# Altium PCB waku-ctl.PcbDoc (part 3 of 5)
Units mil, origin at the board's own origin, x right, y up, seen from the top; angles counter-clockwise.
Board outline 3530 x 2610 mil, 2 copper layers (Top Layer, Bottom Layer); 84 components, 84 nets, 358 pads, 106 vias.
Unrouted connection lines stored in the file: 42.
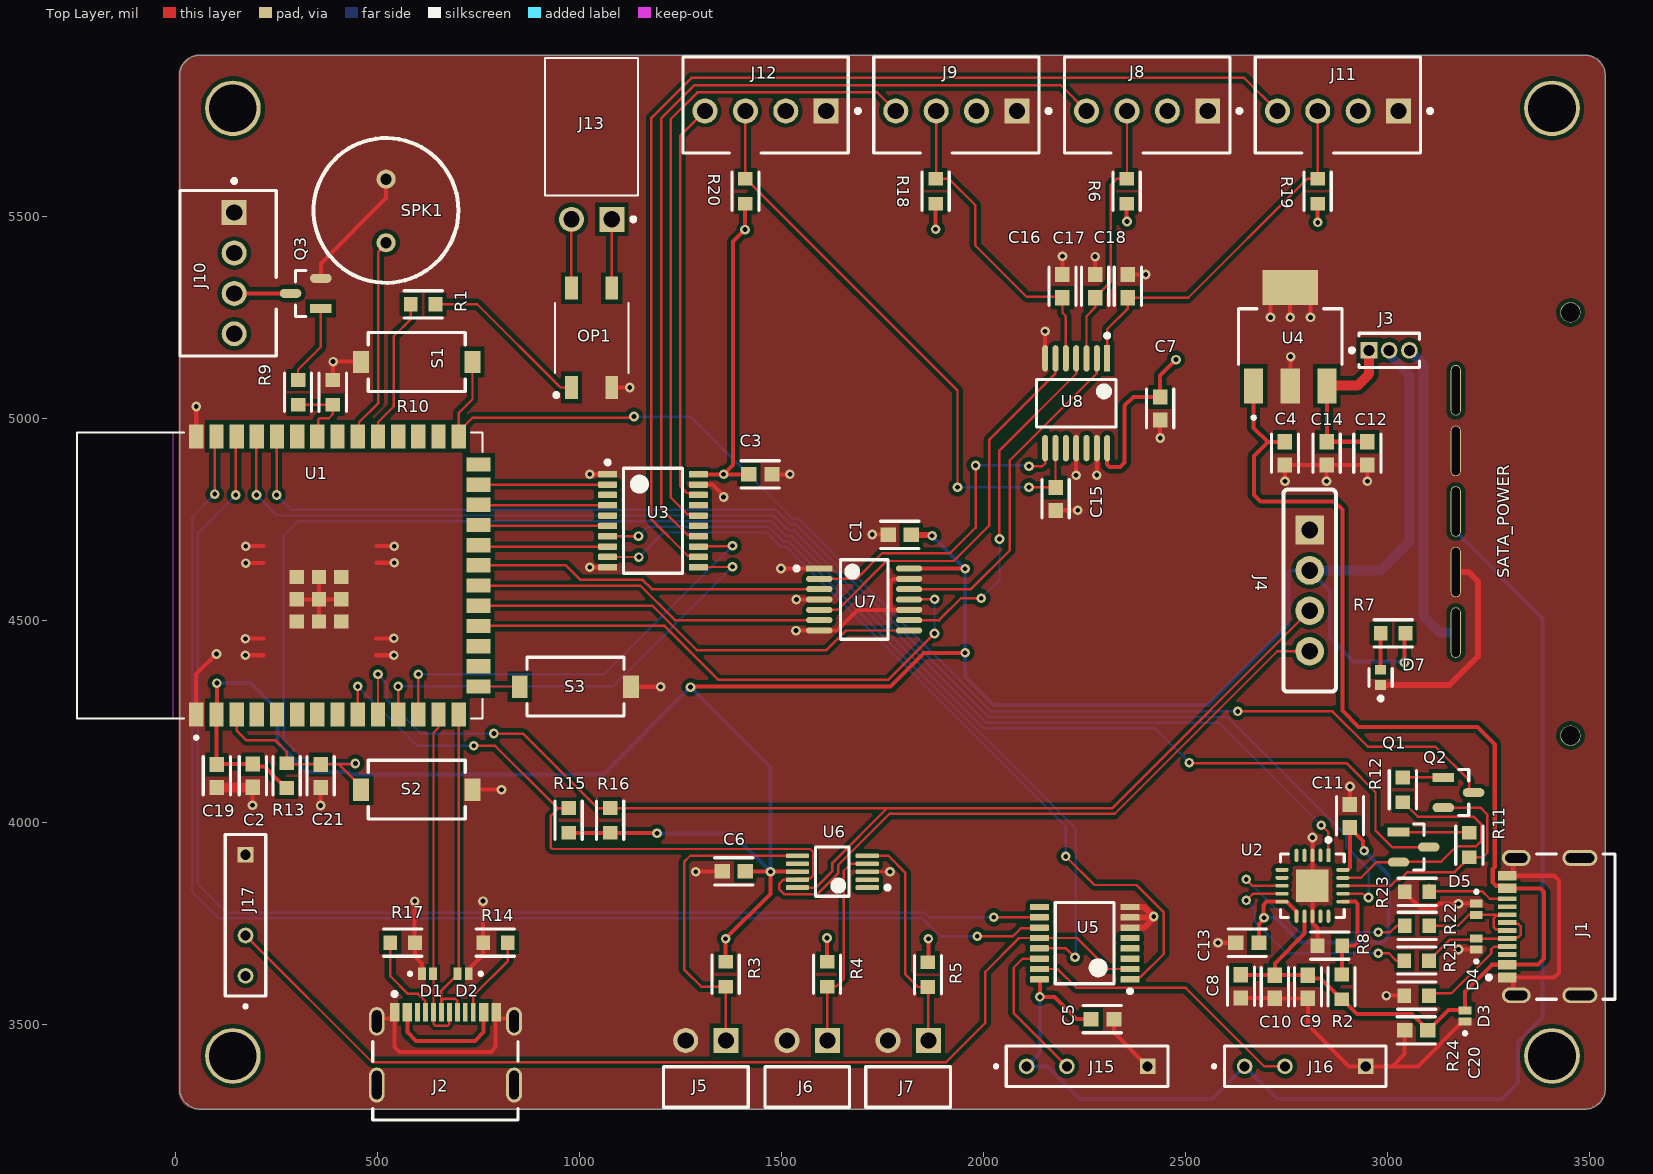
[diagram p0: Top Layer view]

## Part data (continued)
R7 R9: library part RC0603FR-101KL, "RES 1K OHM 1% 1/10W 0603", Case Code (Imperial)=0603, Case Code (Metric)=1608, LCSC Part Number=C1512170, Manufacturer="Yageo Group", Max Operating Temperature=155°C, Min Operating Temperature=-55°C, Power Dissipation=100mW, Supplier Part Number=13-RC0603FR-101KLCT-ND, Temperature Coefficient=100ppm/°C, Tolerance=1%, Voltage Rating=50V, Working Voltage=75V, Case/Package=0603, Category="Chip SMD Resistors", China RoHS=Non-Compliant, ComponentLink1Description=https://datasheet.octopart.com:443/RC0603FR-101KL-Yageo-datasheet-175887523.pdf?src-supplier=IHS, ComponentLink1URL=https://datasheet.octopart.com:443/RC0603FR-101KL-Yageo-datasheet-175887523.pdf?src-supplier=IHS, ComponentLink2Description=https://datasheet.octopart.com:443/RC0603FR-101KL-Yageo-Group-datasheet-190051977.pdf?src-supplier=Newark, ComponentLink2URL=https://datasheet.octopart.com:443/RC0603FR-101KL-Yageo-Group-datasheet-190051977.pdf?src-supplier=Newark, ComponentLink3Description=https://datasheet.octopart.com:443/RC0603FR-101KL-Yageo-Group-datasheet-189192902.pdf?src-supplier=TME, ComponentLink3URL=https://datasheet.octopart.com:443/RC0603FR-101KL-Yageo-Group-datasheet-189192902.pdf?src-supplier=TME, ComponentLink4Description=https://datasheet.octopart.com:443/RC0603FR-101KL-Yageo-Group-datasheet-176638170.pdf?src-supplier=TME, ComponentLink4URL=https://datasheet.octopart.com:443/RC0603FR-101KL-Yageo-Group-datasheet-176638170.pdf?src-supplier=TME, ComponentLink5Description=https://datasheet.octopart.com:443/RC0603FR-101KL-Yageo-datasheet-8328172.pdf?src-supplier=element14+APAC, ComponentLink5URL=https://datasheet.octopart.com:443/RC0603FR-101KL-Yageo-datasheet-8328172.pdf?src-supplier=element14+APAC, ComponentLink6Description=https://datasheet.octopart.com:443/RC0603FR-101KL-Yageo-datasheet-34211833.pdf?src-supplier=element14+APAC, ComponentLink6URL=https://datasheet.octopart.com:443/RC0603FR-101KL-Yageo-datasheet-34211833.pdf?src-supplier=element14+APAC, ComponentLink7Description=https://datasheet.octopart.com:443/RC0603FR-101KL-Yageo-datasheet-164759695.pdf?src-supplier=Future+Electronics, ComponentLink7URL=https://datasheet.octopart.com:443/RC0603FR-101KL-Yageo-datasheet-164759695.pdf?src-supplier=Future+Electronics, ComponentLink8Description=https://datasheet.octopart.com:443/RC0603FR-101KL-Yageo-datasheet-137700087.pdf?src-supplier=Future+Electronics, ComponentLink8URL=https://datasheet.octopart.com:443/RC0603FR-101KL-Yageo-datasheet-137700087.pdf?src-supplier=Future+Electronics, ComponentLink9Description=https://datasheet.octopart.com:443/RC0603FR-101KL-Yageo-datasheet-134544186.pdf?src-supplier=Future+Electronics, ComponentLink9URL=https://datasheet.octopart.com:443/RC0603FR-101KL-Yageo-datasheet-134544186.pdf?src-supplier=Future+Electronics, ComponentLink10Description=https://datasheet.octopart.com/RC0603FR-101KL-Yageo-datasheet-73766026.pdf, ComponentLink10URL=https://datasheet.octopart.com/RC0603FR-101KL-Yageo-datasheet-73766026.pdf, ComponentLink11Description=http://sigma.octopart.com:80/rohs_statement/Yageo-company-2.pdf?src-supplier=Compliance+Statements, ComponentLink11URL=http://sigma.octopart.com:80/rohs_statement/Yageo-company-2.pdf?src-supplier=Compliance+Statements, ComponentLink12Description=http://sigma.octopart.com:80/conflict_mineral_statement/Yageo-company-3.pdf?src-supplier=Compliance+Statements, ComponentLink12URL=http://sigma.octopart.com:80/conflict_mineral_statement/Yageo-company-3.pdf?src-supplier=Compliance+Statements, Composition="Thick Film", Contact Plating="Lead, Tin", Depth=800µm, Height=450µm, Length=1.6mm, Lifecycle Status=Production, Manufacturer Part Number=RC0603FR-101KL, Military Standard=Not, Mounting Technology="Surface Mount", Number of Terminals=2, Pins=2, Power Rating=100mW, Pricing="1=0.1, 10=0.008, 25=0.006, 50=0.004, 100=0.004 (USD)", Radiation Hardening=No, REACH SVHC=Yes, RoHS=Compliant, Schedule B="8533210045, 8533210045|8533210045|8533210045|8533210045|8533210045", Stock=83193, Supplier=DigiKey, Termination=SMD/SMT, Voltage Rating (DC)=50V, Width=800µm
R14 R17 R23 R24: library part RC0603FR-075K1L, "RES 5.1K OHM 1% 1/10W 0603", Case Code (Imperial)=0603, LCSC Part Number=C105580, Manufacturer="Yageo Group", Max Operating Temperature=155°C, Max Power Dissipation=100mW, Min Operating Temperature=-55°C, Supplier Part Number=311-5.10KHRCT-ND, Temperature Coefficient=100ppm/°C, Tolerance=1%, Voltage Rating=75V, Voltage Rating (DC)=50V, Case/Package=0603, Category="Chip SMD Resistors", China RoHS=Non-Compliant, ComponentLink1Description=https://datasheet.octopart.com:443/RC0603FR-075K1L-Yageo-datasheet-175887523.pdf?src-supplier=IHS, ComponentLink1URL=https://datasheet.octopart.com:443/RC0603FR-075K1L-Yageo-datasheet-175887523.pdf?src-supplier=IHS, ComponentLink2Description=https://datasheet.octopart.com:443/RC0603FR-075K1L-Yageo-datasheet-103092701.pdf?src-supplier=Upverter, ComponentLink2URL=https://datasheet.octopart.com:443/RC0603FR-075K1L-Yageo-datasheet-103092701.pdf?src-supplier=Upverter, ComponentLink3Description=https://datasheet.octopart.com:443/RC0603FR-075K1L-Yageo-datasheet-8328172.pdf?src-supplier=Farnell, ComponentLink3URL=https://datasheet.octopart.com:443/RC0603FR-075K1L-Yageo-datasheet-8328172.pdf?src-supplier=Farnell, ComponentLink4Description=https://datasheet.octopart.com:443/RC0603FR-075K1L-Yageo-datasheet-62067350.pdf?src-supplier=Farnell, ComponentLink4URL=https://datasheet.octopart.com:443/RC0603FR-075K1L-Yageo-datasheet-62067350.pdf?src-supplier=Farnell, ComponentLink5Description=https://datasheet.octopart.com:443/RC0603FR-075K1L-Yageo-datasheet-34211833.pdf?src-supplier=element14+APAC, ComponentLink5URL=https://datasheet.octopart.com:443/RC0603FR-075K1L-Yageo-datasheet-34211833.pdf?src-supplier=element14+APAC, ComponentLink6Description=https://datasheet.octopart.com:443/RC0603FR-075K1L-Yageo-datasheet-164759695.pdf?src-supplier=Future+Electronics, ComponentLink6URL=https://datasheet.octopart.com:443/RC0603FR-075K1L-Yageo-datasheet-164759695.pdf?src-supplier=Future+Electronics, ComponentLink7Description=https://datasheet.octopart.com:443/RC0603FR-075K1L-Yageo-datasheet-137700087.pdf?src-supplier=Future+Electronics, ComponentLink7URL=https://datasheet.octopart.com:443/RC0603FR-075K1L-Yageo-datasheet-137700087.pdf?src-supplier=Future+Electronics, ComponentLink8Description=https://datasheet.octopart.com:443/RC0603FR-075K1L-Yageo-datasheet-15599030.pdf?src-supplier=Future+Electronics, ComponentLink8URL=https://datasheet.octopart.com:443/RC0603FR-075K1L-Yageo-datasheet-15599030.pdf?src-supplier=Future+Electronics, ComponentLink9Description=https://datasheet.octopart.com:443/RC0603FR-075K1L-Yageo-datasheet-12596169.pdf?src-supplier=Future+Electronics, ComponentLink9URL=https://datasheet.octopart.com:443/RC0603FR-075K1L-Yageo-datasheet-12596169.pdf?src-supplier=Future+Electronics, ComponentLink10Description=https://datasheet.octopart.com:443/RC0603FR-075K1L-Yageo-datasheet-503470.pdf?src-supplier=Future+Electronics, ComponentLink10URL=https://datasheet.octopart.com:443/RC0603FR-075K1L-Yageo-datasheet-503470.pdf?src-supplier=Future+Electronics, ComponentLink11Description=https://datasheet.octopart.com:443/RC0603FR-075K1L-Yageo-datasheet-148775077.pdf?src-supplier=TME, ComponentLink11URL=https://datasheet.octopart.com:443/RC0603FR-075K1L-Yageo-datasheet-148775077.pdf?src-supplier=TME, ComponentLink12Description=https://datasheet.octopart.com:443/RC0603FR-075K1L-Yageo-datasheet-79472498.pdf?src-supplier=Megastar, ComponentLink12URL=https://datasheet.octopart.com:443/RC0603FR-075K1L-Yageo-datasheet-79472498.pdf?src-supplier=Megastar, ComponentLink13Description=https://datasheet.octopart.com/RC0603FR-075K1L-Yageo-datasheet-73766026.pdf, ComponentLink13URL=https://datasheet.octopart.com/RC0603FR-075K1L-Yageo-datasheet-73766026.pdf, ComponentLink14Description=https://datasheet.octopart.com:443/RC0603FR-075K1L-Yageo-datasheet-118562.pdf?src-supplier=DigiKey, ComponentLink14URL=https://datasheet.octopart.com:443/RC0603FR-075K1L-Yageo-datasheet-118562.pdf?src-supplier=DigiKey, ComponentLink15Description=http://sigma.octopart.com:80/rohs_statement/Yageo-company-2.pdf?src-supplier=Compliance+Statements, ComponentLink15URL=http://sigma.octopart.com:80/rohs_statement/Yageo-company-2.pdf?src-supplier=Compliance+Statements, ComponentLink16Description=http://sigma.octopart.com:80/conflict_mineral_statement/Yageo-company-3.pdf?src-supplier=Compliance+Statements, ComponentLink16URL=http://sigma.octopart.com:80/conflict_mineral_statement/Yageo-company-3.pdf?src-supplier=Compliance+Statements, Composition="Thick Film", Depth=800µm, Features="Moisture Resistant", Height=450µm, Lead Free="Lead Free", Lifecycle Status=Production, Manufacturer Part Number=RC0603FR-075K1L, Military Standard=Not, Mounting Technology="Surface Mount", Number of Terminals=2, Number of Terminations=2, Packaging="Tape & Reel", Pins=2, Power Dissipation=100mW, Power Rating=100mW, Pricing="1=0.1, 10=0.007, 25=0.0068, 50=0.0062, 100=0.0056 (USD)", REACH SVHC=Yes, RoHS=Compliant, Schedule B="8533210045, 8533210045|8533210045, 8533210045|8533210045|8533210045, 8533210045|8533210045|8533210045|8533210045", Stock=779853, Supplier=DigiKey, Termination=SMD/SMT, Width=800µm, Working Voltage=75V
R21 R22: library part RC0603FR-0727RL, "RES 27 OHM 1% 1/10W 0603", Case Code (Imperial)=0603, LCSC Part Number=C137753, Manufacturer="Yageo Group", Max Operating Temperature=155°C, Max Power Dissipation=100mW, Min Operating Temperature=-55°C, Supplier Part Number=311-27.0HRCT-ND, Temperature Coefficient=100ppm/°C, Tolerance=1%, Voltage Rating=75V, Voltage Rating (AC)=50V, Case/Package=0603, Category="Chip SMD Resistors", China RoHS=Non-Compliant, ComponentLink1Description=https://datasheet.octopart.com:443/RC0603FR-0727RL-Yageo-datasheet-175887523.pdf?src-supplier=Newark, ComponentLink1URL=https://datasheet.octopart.com:443/RC0603FR-0727RL-Yageo-datasheet-175887523.pdf?src-supplier=Newark, ComponentLink2Description=https://datasheet.octopart.com:443/RC0603FR-0727RL-Yageo-datasheet-8328172.pdf?src-supplier=Newark, ComponentLink2URL=https://datasheet.octopart.com:443/RC0603FR-0727RL-Yageo-datasheet-8328172.pdf?src-supplier=Newark, ComponentLink3Description=https://datasheet.octopart.com:443/RC0603FR-0727RL-Yageo-datasheet-34211833.pdf?src-supplier=Newark, ComponentLink3URL=https://datasheet.octopart.com:443/RC0603FR-0727RL-Yageo-datasheet-34211833.pdf?src-supplier=Newark, ComponentLink4Description=https://datasheet.octopart.com:443/RC0603FR-0727RL-Yageo-datasheet-62067350.pdf?src-supplier=Newark, ComponentLink4URL=https://datasheet.octopart.com:443/RC0603FR-0727RL-Yageo-datasheet-62067350.pdf?src-supplier=Newark, ComponentLink5Description=https://datasheet.octopart.com:443/RC0603FR-0727RL-Yageo-datasheet-103092701.pdf?src-supplier=Upverter, ComponentLink5URL=https://datasheet.octopart.com:443/RC0603FR-0727RL-Yageo-datasheet-103092701.pdf?src-supplier=Upverter, ComponentLink6Description=https://datasheet.octopart.com:443/RC0603FR-0727RL-Yageo-datasheet-164759695.pdf?src-supplier=Future+Electronics, ComponentLink6URL=https://datasheet.octopart.com:443/RC0603FR-0727RL-Yageo-datasheet-164759695.pdf?src-supplier=Future+Electronics, ComponentLink7Description=https://datasheet.octopart.com:443/RC0603FR-0727RL-Yageo-datasheet-137700087.pdf?src-supplier=Future+Electronics, ComponentLink7URL=https://datasheet.octopart.com:443/RC0603FR-0727RL-Yageo-datasheet-137700087.pdf?src-supplier=Future+Electronics, ComponentLink8Description=https://datasheet.octopart.com:443/RC0603FR-0727RL-Yageo-datasheet-27584510.pdf?src-supplier=Future+Electronics, ComponentLink8URL=https://datasheet.octopart.com:443/RC0603FR-0727RL-Yageo-datasheet-27584510.pdf?src-supplier=Future+Electronics, ComponentLink9Description=https://datasheet.octopart.com:443/RC0603FR-0727RL-Yageo-datasheet-15599030.pdf?src-supplier=Future+Electronics, ComponentLink9URL=https://datasheet.octopart.com:443/RC0603FR-0727RL-Yageo-datasheet-15599030.pdf?src-supplier=Future+Electronics, ComponentLink10Description=https://datasheet.octopart.com:443/RC0603FR-0727RL-Yageo-datasheet-12596169.pdf?src-supplier=Future+Electronics, ComponentLink10URL=https://datasheet.octopart.com:443/RC0603FR-0727RL-Yageo-datasheet-12596169.pdf?src-supplier=Future+Electronics, ComponentLink11Description=https://datasheet.octopart.com:443/RC0603FR-0727RL-Yageo-datasheet-8324193.pdf?src-supplier=Future+Electronics, ComponentLink11URL=https://datasheet.octopart.com:443/RC0603FR-0727RL-Yageo-datasheet-8324193.pdf?src-supplier=Future+Electronics, ComponentLink12Description=https://datasheet.octopart.com:443/RC0603FR-0727RL-Yageo-datasheet-148775077.pdf?src-supplier=TME, ComponentLink12URL=https://datasheet.octopart.com:443/RC0603FR-0727RL-Yageo-datasheet-148775077.pdf?src-supplier=TME, ComponentLink13Description=https://datasheet.octopart.com/RC0603FR-0727RL-Yageo-datasheet-73766026.pdf, ComponentLink13URL=https://datasheet.octopart.com/RC0603FR-0727RL-Yageo-datasheet-73766026.pdf, ComponentLink14Description=https://datasheet.octopart.com:443/RC0603FR-0727RL-Yageo-datasheet-118562.pdf?src-supplier=DigiKey, ComponentLink14URL=https://datasheet.octopart.com:443/RC0603FR-0727RL-Yageo-datasheet-118562.pdf?src-supplier=DigiKey, ComponentLink15Description=http://sigma.octopart.com:80/rohs_statement/Yageo-company-2.pdf?src-supplier=Compliance+Statements, ComponentLink15URL=http://sigma.octopart.com:80/rohs_statement/Yageo-company-2.pdf?src-supplier=Compliance+Statements, ComponentLink16Description=http://sigma.octopart.com:80/conflict_mineral_statement/Yageo-company-3.pdf?src-supplier=Compliance+Statements, ComponentLink16URL=http://sigma.octopart.com:80/conflict_mineral_statement/Yageo-company-3.pdf?src-supplier=Compliance+Statements, Composition="Thick Film", Depth=800µm, Features="Moisture Resistant", Height=450µm, Lead Free="Lead Free", Length=1.6mm, Lifecycle Status=Production, Manufacturer Part Number=RC0603FR-0727RL, Mounting Technology="Surface Mount", Number of Terminals=2, Number of Terminations=2, Packaging="Tape & Reel", Pins=2, Power Dissipation=100mW, Power Rating=100mW, Pricing="1=0.11, 10=0.011, 25=0.0092, 50=0.0052 (USD)", REACH SVHC=Yes, RoHS=Compliant, Schedule B="8533210045, 8533210045|8533210045|8533210045|8533210045|8533210045|8533210045|8533210045|8533210045|8533210045|8533210045|8533210045|8533210045|8533210045|8533210045, 8533210045|8533210045|8533210045|8533210045|8533210045|8533210045|8533210045|8533210045|8533210045|8533210045|8533210045|8533210045|8533210045|8533210045|8533210045, 8533210045|8533210045|8533210045|8533210045|8533210045|8533210045|8533210045|8533210045|8533210045|8533210045|8533210045|8533210045|8533210045|8533210045|8533210045|8533210045", Stock=368686, Supplier=DigiKey, Termination=SMD/SMT, Voltage Rating (DC)=50V, Width=800µm, Working Voltage=75V
S1 S2 S3: "SWITCH TACTILE SPST-NO 0.05A 12V", Color=White, Contact Resistance=100mΩ, Insulation Resistance=100MΩ, LCSC Part Number=C2689642, Manufacturer="C&K Components", Max Current Rating=50mA, Max Operating Temperature=90°C, Max Voltage Rating (DC)=12V, Min Operating Temperature=-40°C, Operating Force=2.06N, Supplier Part Number=41AJ9861, Category="Tactile Switches", ComponentLink1Description=https://datasheet.octopart.com:443/PTS636SMG25JSMTRLFS-C%26K-Components-datasheet-180017273.pdf?src-supplier=IHS, ComponentLink1URL=https://datasheet.octopart.com:443/PTS636SMG25JSMTRLFS-C%26K-Components-datasheet-180017273.pdf?src-supplier=IHS, ComponentLink2Description=https://datasheet.octopart.com:443/PTS636SMG25JSMTRLFS-C%26K-Components-datasheet-136360845.pdf?src-supplier=Electro+Sonic, ComponentLink2URL=https://datasheet.octopart.com:443/PTS636SMG25JSMTRLFS-C%26K-Components-datasheet-136360845.pdf?src-supplier=Electro+Sonic, Electrical Life=70kcycles, Height=1.9mm, Length=6.1mm, Lifecycle Status=Production, Manufacturer Part Number=PTS636SMG25JSMTRLFS, Number of Positions=1, Pricing="3000=0.155 (USD)", REACH SVHC=Yes, RoHS=Compliant, Schedule B=8536509065, Sealable=IP40, Stock=12000, Supplier=Newark, Throw Configuration=SPST
SATA_POWER: library part SATA-15pin-power, "SATA 15 pin power connector from aliexpress"
SPK1: library part HC9042-16, "Slim speaker from aliexpress", LCSC Part Number=C49246946
U1: "ESP32-S3R8 RF TXRX MOD BT WIFI PCB TH SMD", LCSC Part Number=C2913201, Manufacturer="Espressif Systems", Max Operating Temperature=65°C, Max Supply Voltage=3.6V, Min Operating Temperature=-40°C, Min Supply Voltage=3V, Operating Supply Voltage=3.3V, Supplier Part Number=5407-ESP32-S3-WROOM-1-N8R8CT-ND, Category="System on Chip (SoC)", ComponentLink1Description=https://datasheet.octopart.com:443/ESP32-S3-WROOM-1-N8R8-Espressif-Systems-datasheet-165560563.pdf?src-supplier=IHS, ComponentLink1URL=https://datasheet.octopart.com:443/ESP32-S3-WROOM-1-N8R8-Espressif-Systems-datasheet-165560563.pdf?src-supplier=IHS, ComponentLink2Description=https://datasheet.octopart.com:443/ESP32-S3-WROOM-1-N8R8-Espressif-Systems-datasheet-175575506.pdf?src-supplier=SOS+electronic, ComponentLink2URL=https://datasheet.octopart.com:443/ESP32-S3-WROOM-1-N8R8-Espressif-Systems-datasheet-175575506.pdf?src-supplier=SOS+electronic, ComponentLink3Description=https://datasheet.octopart.com:443/ESP32-S3-WROOM-1-N8R8-Espressif-Systems-datasheet-164663773.pdf?src-supplier=SOS+electronic, ComponentLink3URL=https://datasheet.octopart.com:443/ESP32-S3-WROOM-1-N8R8-Espressif-Systems-datasheet-164663773.pdf?src-supplier=SOS+electronic, ComponentLink4Description=https://datasheet.octopart.com:443/ESP32-S3-WROOM-1-N8R8-Espressif-Systems-datasheet-188867343.pdf?src-supplier=TME, ComponentLink4URL=https://datasheet.octopart.com:443/ESP32-S3-WROOM-1-N8R8-Espressif-Systems-datasheet-188867343.pdf?src-supplier=TME, ComponentLink5Description=https://datasheet.octopart.com:443/ESP32-S3-WROOM-1-N8R8-Espressif-Systems-datasheet-165560559.pdf?src-supplier=TME, ComponentLink5URL=https://datasheet.octopart.com:443/ESP32-S3-WROOM-1-N8R8-Espressif-Systems-datasheet-165560559.pdf?src-supplier=TME, Height - Seated (Max)=3.25mm, Length=25.5mm, Manufacturer Part Number=ESP32-S3-WROOM-1-N8R8, Number of Terminals=41, Pricing="1=5.22, 1=6.13, 10=4.528, 10=5.313, 25=5.22, 25=5.0276, 100=3.9504, 100=4.635, 250=3.75, 250=4.39984, 650=4.17352, 1300=4.02062, 1950=3.93533 (EUR)", RoHS=Compliant, Stock=10970, Supplier=DigiKey, Terminal Pitch=1.27mm, Width=18mm
U2: "IC USB SERIAL FULL UART 20QFN", Ambient Temperature Range High=85°C, Case/Package=QFN, Clock Frequency=12.02MHz, LCSC Part Number=C132159, Manufacturer=FTDI, Max Supply Current=8.4mA, Max Supply Voltage=5.5V, Min Operating Temperature=-40°C, Min Supply Voltage=2.97V, Operating Supply Current=8mA, Operating Supply Voltage=5V, Supplier Part Number=768-1128-6-ND, Category="Interface ICs", ComponentLink1Description=https://datasheet.octopart.com:443/FT231XQ-R-FTDI-datasheet-182343132.pdf?src-supplier=IHS, ComponentLink1URL=https://datasheet.octopart.com:443/FT231XQ-R-FTDI-datasheet-182343132.pdf?src-supplier=IHS, ComponentLink2Description=https://datasheet.octopart.com:443/FT231XQ-R-FTDI-datasheet-11021087.pdf?src-supplier=ODG+(Origin+Data+Global), ComponentLink2URL=https://datasheet.octopart.com:443/FT231XQ-R-FTDI-datasheet-11021087.pdf?src-supplier=ODG+(Origin+Data+Global), ComponentLink3Description=https://datasheet.octopart.com:443/FT231XQ-R-FTDI-datasheet-28834672.pdf?src-supplier=SOS+electronic, ComponentLink3URL=https://datasheet.octopart.com:443/FT231XQ-R-FTDI-datasheet-28834672.pdf?src-supplier=SOS+electronic, ComponentLink4Description=https://datasheet.octopart.com:443/FT231XQ-R-FTDI-datasheet-68321328.pdf?src-supplier=TME, ComponentLink4URL=https://datasheet.octopart.com:443/FT231XQ-R-FTDI-datasheet-68321328.pdf?src-supplier=TME, ComponentLink5Description=https://datasheet.octopart.com:443/FT231XQ-R-FTDI-datasheet-134530624.pdf?src-supplier=SHENGYU+ELECTRONICS, ComponentLink5URL=https://datasheet.octopart.com:443/FT231XQ-R-FTDI-datasheet-134530624.pdf?src-supplier=SHENGYU+ELECTRONICS, Data Rate=12Mbps, Height=800µm, Height - Seated (Max)=800µm, Interface="UART, USB", Lead Free="Lead Free", Length=4mm, Lifecycle Status=Production, Manufacturer Part Number=FT231XQ-R, Max Operating Temperature=85°C, Mounting Technology="Surface Mount", Number of Channels=1, Number of Terminals=20, Pins=20, Pricing="1=2.34, 25=2.27, 100=2.2, 250=2, 500=1.82002, 1000=1.7625 (USD)", REACH SVHC=Yes, RoHS=Compliant, Supplier=DigiKey, Terminal Pitch=500µm, Weight=123.008581mg, Width=4mm
U3: "IC BUFF NON-INVERT 5.5V 20-TSSOP", Case/Package=TSSOP, High Level Output Current=-8mA, LCSC Part Number=C484743, Low Level Output Current=8mA, Manufacturer="Texas Instruments", Manufacturer Lifecycle Status=ACTIVE, Max Operating Temperature=85°C, Max Supply Voltage=5.5V, Min Operating Temperature=-40°C, Min Supply Voltage=4.5V, Operating Supply Voltage=5V, Quiescent Current=4µA, Supplier Part Number=296-1116-1-ND, Category="Buffers, Drivers and Transceivers", ComponentLink1Description=https://sigma.octopart.com:443/157851284/technical_drawing/Texas-Instruments-SN74AHCT244PWR.pdf?src-supplier=Texas+Instruments, ComponentLink1URL=https://sigma.octopart.com:443/157851284/technical_drawing/Texas-Instruments-SN74AHCT244PWR.pdf?src-supplier=Texas+Instruments, ComponentLink2Description=https://octopart.com:443/opatz8j6/c1?t=ghJe61n6HiV89-olIjnD38o8K6r9WHTix1tz--1XTpLdkr2Jj0G4zOn4bLiip8ksXJJvDeh_h3XhqV3jFUJDynLYxNoMjyL6NHEpR466wJPtLzw6tBs8gVvIJiLd6aD6UOZIFlskqp0Ep-8gAfLYIZrLVC2xGoymhvH6oXEY9SqN9vbZTloM6avEvf1MB4bD9V1LVp5Lqbi76W7Pl0ucb4l3O25e1vmsXHl0eRZQQtPLcXZwTMNzzJtWnucU1VVaUsawfLREJD5cDAmW7KbiTywpqqWmTFGKRQhdz7VfrRB-SHHmtMjKPksFRvFMQGN1zkEgT_5fzMhbt_l2pvOSM86ovXfmvhbsuKtmu2Jjs9X6CZO94yvkhC5MZAtb2ElL0nUN7tboUw&src-supplier=Texas+Instruments, ComponentLink2URL=https://octopart.com:443/opatz8j6/c1?t=ghJe61n6HiV89-olIjnD38o8K6r9WHTix1tz--1XTpLdkr2Jj0G4zOn4bLiip8ksXJJvDeh_h3XhqV3jFUJDynLYxNoMjyL6NHEpR466wJPtLzw6tBs8gVvIJiLd6aD6UOZIFlskqp0Ep-8gAfLYIZrLVC2xGoymhvH6oXEY9SqN9vbZTloM6avEvf1MB4bD9V1LVp5Lqbi76W7Pl0ucb4l3O25e1vmsXHl0eRZQQtPLcXZwTMNzzJtWnucU1VVaUsawfLREJD5cDAmW7KbiTywpqqWmTFGKRQhdz7VfrRB-SHHmtMjKPksFRvFMQGN1zkEgT_5fzMhbt_l2pvOSM86ovXfmvhbsuKtmu2Jjs9X6CZO94yvkhC5MZAtb2ElL0nUN7tboUw&src-supplier=Texas+Instruments, ComponentLink3Description=https://datasheet.octopart.com:443/SN74AHCT244PWR-Texas-Instruments-datasheet-41214155.pdf?src-supplier=Texas+Instruments, ComponentLink3URL=https://datasheet.octopart.com:443/SN74AHCT244PWR-Texas-Instruments-datasheet-41214155.pdf?src-supplier=Texas+Instruments, ComponentLink4Description=https://datasheet.octopart.com:443/SN74AHCT244PWR-Texas-Instruments-datasheet-10254144.pdf?src-supplier=Texas+Instruments, ComponentLink4URL=https://datasheet.octopart.com:443/SN74AHCT244PWR-Texas-Instruments-datasheet-10254144.pdf?src-supplier=Texas+Instruments, ComponentLink5Description=https://sigma.octopart.com:443/49249835/technical_drawing/Texas-Instruments-SN74AHCT244PWR.pdf?src-supplier=Texas+Instruments, ComponentLink5URL=https://sigma.octopart.com:443/49249835/technical_drawing/Texas-Instruments-SN74AHCT244PWR.pdf?src-supplier=Texas+Instruments, ComponentLink6Description=https://datasheet.octopart.com:443/SN74AHCT244PWR-Texas-Instruments-datasheet-152663.pdf?src-supplier=Texas+Instruments, ComponentLink6URL=https://datasheet.octopart.com:443/SN74AHCT244PWR-Texas-Instruments-datasheet-152663.pdf?src-supplier=Texas+Instruments, ComponentLink7Description=https://datasheet.octopart.com:443/SN74AHCT244PWR-Texas-Instruments-datasheet-27606291.pdf?src-supplier=element14+APAC, ComponentLink7URL=https://datasheet.octopart.com:443/SN74AHCT244PWR-Texas-Instruments-datasheet-27606291.pdf?src-supplier=element14+APAC, ComponentLink8Description=https://datasheet.octopart.com:443/SN74AHCT244PWR-Texas-Instruments-datasheet-21133542.pdf?src-supplier=element14+APAC, ComponentLink8URL=https://datasheet.octopart.com:443/SN74AHCT244PWR-Texas-Instruments-datasheet-21133542.pdf?src-supplier=element14+APAC, ComponentLink9Description=https://datasheet.octopart.com:443/SN74AHCT244PWR-Texas-Instruments-datasheet-27203569.pdf?src-supplier=element14+APAC, ComponentLink9URL=https://datasheet.octopart.com:443/SN74AHCT244PWR-Texas-Instruments-datasheet-27203569.pdf?src-supplier=element14+APAC, ComponentLink10Description=https://datasheet.octopart.com:443/SN74AHCT244PWR-Texas-Instruments-datasheet-25360952.pdf?src-supplier=element14+APAC, ComponentLink10URL=https://datasheet.octopart.com:443/SN74AHCT244PWR-Texas-Instruments-datasheet-25360952.pdf?src-supplier=element14+APAC, ComponentLink11Description=https://datasheet.octopart.com:443/SN74AHCT244PWR-Texas-Instruments-datasheet-65863357.pdf?src-supplier=Farnell, ComponentLink11URL=https://datasheet.octopart.com:443/SN74AHCT244PWR-Texas-Instruments-datasheet-65863357.pdf?src-supplier=Farnell, ComponentLink12Description=https://datasheet.octopart.com:443/SN74AHCT244PWR-Texas-Instruments-datasheet-11523990.pdf?src-supplier=Farnell, ComponentLink12URL=https://datasheet.octopart.com:443/SN74AHCT244PWR-Texas-Instruments-datasheet-11523990.pdf?src-supplier=Farnell, ComponentLink13Description=https://datasheet.octopart.com:443/SN74AHCT244PWR-Texas-Instruments-datasheet-11003095.pdf?src-supplier=Farnell, ComponentLink13URL=https://datasheet.octopart.com:443/SN74AHCT244PWR-Texas-Instruments-datasheet-11003095.pdf?src-supplier=Farnell, ComponentLink14Description=https://datasheet.octopart.com:443/SN74AHCT244PWR-Texas-Instruments-datasheet-8361317.pdf?src-supplier=Newark, ComponentLink14URL=https://datasheet.octopart.com:443/SN74AHCT244PWR-Texas-Instruments-datasheet-8361317.pdf?src-supplier=Newark, ComponentLink15Description=https://datasheet.octopart.com:443/SN74AHCT244PWR-Texas-Instruments-datasheet-5317733.pdf?src-supplier=Newark, ComponentLink15URL=https://datasheet.octopart.com:443/SN74AHCT244PWR-Texas-Instruments-datasheet-5317733.pdf?src-supplier=Newark, ComponentLink16Description=https://datasheet.octopart.com:443/SN74AHCT244PWR-Texas-Instruments-datasheet-166100610.pdf?src-supplier=Augswan, ComponentLink16URL=https://datasheet.octopart.com:443/SN74AHCT244PWR-Texas-Instruments-datasheet-166100610.pdf?src-supplier=Augswan, ComponentLink17Description=https://datasheet.octopart.com:443/SN74AHCT244PWR-Texas-Instruments-datasheet-164411996.pdf?src-supplier=SHENGYU+ELECTRONICS, ComponentLink17URL=https://datasheet.octopart.com:443/SN74AHCT244PWR-Texas-Instruments-datasheet-164411996.pdf?src-supplier=SHENGYU+ELECTRONICS, ComponentLink18Description=https://datasheet.octopart.com:443/SN74AHCT244PWR-Texas-Instruments-datasheet-159115862.pdf?src-supplier=LCSC, ComponentLink18URL=https://datasheet.octopart.com:443/SN74AHCT244PWR-Texas-Instruments-datasheet-159115862.pdf?src-supplier=LCSC, ComponentLink19Description=https://datasheet.octopart.com:443/SN74AHCT244PWR-Texas-Instruments-datasheet-17022234.pdf?src-supplier=Factory+Futures, ComponentLink19URL=https://datasheet.octopart.com:443/SN74AHCT244PWR-Texas-Instruments-datasheet-17022234.pdf?src-supplier=Factory+Futures, ComponentLink20Description=https://datasheet.octopart.com:443/SN74AHCT244PWR-Texas-Instruments-datasheet-14144309.pdf?src-supplier=iiiC, ComponentLink20URL=https://datasheet.octopart.com:443/SN74AHCT244PWR-Texas-Instruments-datasheet-14144309.pdf?src-supplier=iiiC, ComponentLink21Description=https://datasheet.octopart.com:443/SN74AHCT244PWR-Texas-Instruments-datasheet-7556590.pdf?src-supplier=Jameco, ComponentLink21URL=https://datasheet.octopart.com:443/SN74AHCT244PWR-Texas-Instruments-datasheet-7556590.pdf?src-supplier=Jameco, ComponentLink22Description=https://datasheet.octopart.com:443/SN74AHCT244PWR-Texas-Instruments-datasheet-115050.pdf?src-supplier=Sierra+IC, ComponentLink22URL=https://datasheet.octopart.com:443/SN74AHCT244PWR-Texas-Instruments-datasheet-115050.pdf?src-supplier=Sierra+IC, ComponentLink23Description=https://datasheet.octopart.com:443/SN74AHCT244PWR-Texas-Instruments-datasheet-2641.pdf?src-supplier=DigiKey, ComponentLink23URL=https://datasheet.octopart.com:443/SN74AHCT244PWR-Texas-Instruments-datasheet-2641.pdf?src-supplier=DigiKey, ComponentLink24Description=http://sigma.octopart.com:80/conflict_mineral_statement/Texas-Instruments-company-63.pdf?src-supplier=Compliance+Statements, ComponentLink24URL=http://sigma.octopart.com:80/conflict_mineral_statement/Texas-Instruments-company-63.pdf?src-supplier=Compliance+Statements, ComponentLink25Description=http://sigma.octopart.com:80/reach_statement/Texas-Instruments-company-64.pdf?src-supplier=Compliance+Statements, ComponentLink25URL=http://sigma.octopart.com:80/reach_statement/Texas-Instruments-company-64.pdf?src-supplier=Compliance+Statements, Contact Plating=Gold, Height=0m, Lead Free="Lead Free", Length=6.5mm, Lifecycle Status=Production, Logic Function="Buffer, Inverting", Manufacturer Part Number=SN74AHCT244PWR, Mounting Technology="Surface Mount", Number of Bits=8, Number of Bits per Element=4, Number of Elements=2, Number of Input Lines=8, Number of Inputs=8, Number of Output Lines=8, Number of Outputs=8, Packaging="Cut Tape", Pins=20, Polarity=Non-Inverting, Pricing="1=0.43, 10=0.302, 25=0.43, 100=0.2343, 250=0.21744, 500=0.2073, 1000=0.20069 (EUR)", Propagation Delay=8.4ns, Radiation Hardening=No, REACH SVHC=No, RoHS=Compliant, Schedule B="8542390000, 8542390000|8542390000|8542390000|8542390000|8542390000", Stock=11683, Supplier=DigiKey, Termination=SMD/SMT, Thickness=1mm, Turn-On Delay Time=13ns, Width=4.4mm
U4: "IC REG LINEAR 3.3V 1A SOT-223-3", Case/Package=TO-261-4, Dropout Voltage=360mV, LCSC Part Number=C500795, Manufacturer="Diodes Inc.", Max Junction Temperature (Tj)=150°C, Max Operating Temperature=85°C, Max Supply Voltage=6V, Min Current Limit=1.1A, Min Input Voltage=4.3V, Min Operating Temperature=-40°C, Output Current=1A, Output Voltage=3.3V, Supplier Part Number=AP7361C-33E-13DICT-ND, Voltage Tolerance=1%, Category="LDO Voltage Regulators", China RoHS=Compliant, ComponentLink1Description=https://datasheet.octopart.com:443/AP7361C-33E-13-Diodes-Inc.-datasheet-159616639.pdf?src-supplier=IHS, ComponentLink1URL=https://datasheet.octopart.com:443/AP7361C-33E-13-Diodes-Inc.-datasheet-159616639.pdf?src-supplier=IHS, ComponentLink2Description=https://datasheet.octopart.com:443/AP7361C-33E-13-Diodes-Inc.-datasheet-101745716.pdf?src-supplier=Future+Electronics, ComponentLink2URL=https://datasheet.octopart.com:443/AP7361C-33E-13-Diodes-Inc.-datasheet-101745716.pdf?src-supplier=Future+Electronics, ComponentLink3Description=https://datasheet.octopart.com:443/AP7361C-33E-13-Diodes-Inc.-datasheet-158996477.pdf?src-supplier=SHENGYU+ELECTRONICS, ComponentLink3URL=https://datasheet.octopart.com:443/AP7361C-33E-13-Diodes-Inc.-datasheet-158996477.pdf?src-supplier=SHENGYU+ELECTRONICS, Height - Seated (Max)=1.8mm, Length=6.5mm, Lifecycle Status=Production, Manufacturer Part Number=AP7361C-33E-13, Mounting Technology="Surface Mount", Number of Channels=1, Number of Circuits=1, Number of Regulators=1, Number of Terminals=3, Pins=3, Pricing="1=0.39, 10=0.274, 25=0.39, 100=0.2121, 250=0.19664, 500=0.1873, 1000=0.17961 (EUR)", REACH SVHC=Yes, RoHS=Compliant, Schedule B="8542390000, 8542390000|8542390000|8542390000|8542390000|8542390000", Stock=4888, Supplier=DigiKey, Terminal Pitch=2.3mm, Width=3.5mm
U5: "IC SWITCH SPDTX3 130OHM 16TSSOP", Case/Package=TSSOP, Dual Supply Voltage=3V, High Level Output Current=25mA, LCSC Part Number=C2673103, Manufacturer="Texas Instruments", Manufacturer Lifecycle Status=ACTIVE, Max Dual Supply Voltage=5V, Max Operating Temperature=125°C, Max Supply Voltage=5.5V, Min Dual Supply Voltage=1V, Min Operating Temperature=-55°C, Min Supply Voltage=4.5V, Nominal Supply Current=16µA, Supplier Part Number=296-9279-1-ND, Bandwidth=200MHz, Category="Analog Switches and Multiplexers", ComponentLink1Description=https://sigma.octopart.com:443/189718192/technical_drawing/Texas-Instruments-CD74HCT4053PWR.pdf?src-supplier=Texas+Instruments, ComponentLink1URL=https://sigma.octopart.com:443/189718192/technical_drawing/Texas-Instruments-CD74HCT4053PWR.pdf?src-supplier=Texas+Instruments, ComponentLink2Description=https://octopart.com:443/opatz8j6/c1?t=r_EXInCMpPACudhKHzZ8bO5bgSUH3J-qCdRFK7eM-zh2CG9zjUf3zSY1pJujiAxLsrBmH7g8iNICbwVvUDjupCTvpSm23ziT2Rsf8v0JwFdr4nhEGUs8X3qbimKNF4sojUm_sdC48My8RX7newMZQsim8ypD0oplg5H23-Zskb2gpnOwYzN2IxOyKiO0U3m98B2y_JhJSXv1aloE7x8_ft6wIJAiwzPng7kHihF-WIR8yKUl-8_XFKfUm0lqx9F5E99EkWYyZ6glj6wGdA3pMxEu2ukoUMqXVhiEYiL-qtiowiB2hQCVoeQkf6zOjxPA9C3zMK9RAjvLXxGaNaoGjjy9WRMsekgvf89phFeZKXqLTg-uMU4c_tvOGxuAsuLkZsmYt2Jz8Q&src-supplier=Texas+Instruments, ComponentLink2URL=https://octopart.com:443/opatz8j6/c1?t=r_EXInCMpPACudhKHzZ8bO5bgSUH3J-qCdRFK7eM-zh2CG9zjUf3zSY1pJujiAxLsrBmH7g8iNICbwVvUDjupCTvpSm23ziT2Rsf8v0JwFdr4nhEGUs8X3qbimKNF4sojUm_sdC48My8RX7newMZQsim8ypD0oplg5H23-Zskb2gpnOwYzN2IxOyKiO0U3m98B2y_JhJSXv1aloE7x8_ft6wIJAiwzPng7kHihF-WIR8yKUl-8_XFKfUm0lqx9F5E99EkWYyZ6glj6wGdA3pMxEu2ukoUMqXVhiEYiL-qtiowiB2hQCVoeQkf6zOjxPA9C3zMK9RAjvLXxGaNaoGjjy9WRMsekgvf89phFeZKXqLTg-uMU4c_tvOGxuAsuLkZsmYt2Jz8Q&src-supplier=Texas+Instruments, ComponentLink3Description=https://datasheet.octopart.com:443/CD74HCT4053PWR-Texas-Instruments-datasheet-41204773.pdf?src-supplier=Texas+Instruments, ComponentLink3URL=https://datasheet.octopart.com:443/CD74HCT4053PWR-Texas-Instruments-datasheet-41204773.pdf?src-supplier=Texas+Instruments, ComponentLink4Description=https://sigma.octopart.com:443/116621398/technical_drawing/Texas-Instruments-CD74HCT4053PWR.pdf?src-supplier=Texas+Instruments, ComponentLink4URL=https://sigma.octopart.com:443/116621398/technical_drawing/Texas-Instruments-CD74HCT4053PWR.pdf?src-supplier=Texas+Instruments, ComponentLink5Description=https://sigma.octopart.com:443/49249815/technical_drawing/Texas-Instruments-CD74HCT4053PWR.pdf?src-supplier=Texas+Instruments, ComponentLink5URL=https://sigma.octopart.com:443/49249815/technical_drawing/Texas-Instruments-CD74HCT4053PWR.pdf?src-supplier=Texas+Instruments, ComponentLink6Description=https://datasheet.octopart.com:443/CD74HCT4053PWR-Texas-Instruments-datasheet-150011.pdf?src-supplier=Mouser, ComponentLink6URL=https://datasheet.octopart.com:443/CD74HCT4053PWR-Texas-Instruments-datasheet-150011.pdf?src-supplier=Mouser, ComponentLink7Description=https://datasheet.octopart.com:443/CD74HCT4053PWR-Texas-Instruments-datasheet-89139790.pdf?src-supplier=TME, ComponentLink7URL=https://datasheet.octopart.com:443/CD74HCT4053PWR-Texas-Instruments-datasheet-89139790.pdf?src-supplier=TME, ComponentLink8Description=https://datasheet.octopart.com:443/CD74HCT4053PWR-Texas-Instruments-datasheet-165803830.pdf?src-supplier=LCSC, ComponentLink8URL=https://datasheet.octopart.com:443/CD74HCT4053PWR-Texas-Instruments-datasheet-165803830.pdf?src-supplier=LCSC, ComponentLink9Description=https://datasheet.octopart.com:443/CD74HCT4053PWR-Texas-Instruments-datasheet-164413548.pdf?src-supplier=SHENGYU+ELECTRONICS, ComponentLink9URL=https://datasheet.octopart.com:443/CD74HCT4053PWR-Texas-Instruments-datasheet-164413548.pdf?src-supplier=SHENGYU+ELECTRONICS, ComponentLink10Description=https://datasheet.octopart.com:443/CD74HCT4053PWR-Texas-Instruments-datasheet-31668943.pdf?src-supplier=Newark, ComponentLink10URL=https://datasheet.octopart.com:443/CD74HCT4053PWR-Texas-Instruments-datasheet-31668943.pdf?src-supplier=Newark, ComponentLink11Description=https://datasheet.octopart.com:443/CD74HCT4053PWR-Texas-Instruments-datasheet-21220249.pdf?src-supplier=Newark, ComponentLink11URL=https://datasheet.octopart.com:443/CD74HCT4053PWR-Texas-Instruments-datasheet-21220249.pdf?src-supplier=Newark, ComponentLink12Description=https://datasheet.octopart.com:443/CD74HCT4053PWR-Texas-Instruments-datasheet-14119461.pdf?src-supplier=iiiC, ComponentLink12URL=https://datasheet.octopart.com:443/CD74HCT4053PWR-Texas-Instruments-datasheet-14119461.pdf?src-supplier=iiiC, ComponentLink13Description=https://datasheet.octopart.com:443/CD74HCT4053PWR-Texas-Instruments-datasheet-11517245.pdf?src-supplier=Arrow+Electronics, ComponentLink13URL=https://datasheet.octopart.com:443/CD74HCT4053PWR-Texas-Instruments-datasheet-11517245.pdf?src-supplier=Arrow+Electronics, ComponentLink14Description=https://datasheet.octopart.com:443/CD74HCT4053PWR-Texas-Instruments-datasheet-115721.pdf?src-supplier=Sierra+IC, ComponentLink14URL=https://datasheet.octopart.com:443/CD74HCT4053PWR-Texas-Instruments-datasheet-115721.pdf?src-supplier=Sierra+IC, ComponentLink15Description=https://datasheet.octopart.com:443/CD74HCT4053PWR-Texas-Instruments-datasheet-4176.pdf?src-supplier=DigiKey, ComponentLink15URL=https://datasheet.octopart.com:443/CD74HCT4053PWR-Texas-Instruments-datasheet-4176.pdf?src-supplier=DigiKey, ComponentLink16Description=http://sigma.octopart.com:80/conflict_mineral_statement/Texas-Instruments-company-63.pdf?src-supplier=Compliance+Statements, ComponentLink16URL=http://sigma.octopart.com:80/conflict_mineral_statement/Texas-Instruments-company-63.pdf?src-supplier=Compliance+Statements, ComponentLink17Description=http://sigma.octopart.com:80/reach_statement/Texas-Instruments-company-64.pdf?src-supplier=Compliance+Statements, ComponentLink17URL=http://sigma.octopart.com:80/reach_statement/Texas-Instruments-company-64.pdf?src-supplier=Compliance+Statements, Contact Plating=Gold, Height=1.2mm, Lead Free="Lead Free", Length=5mm, Lifecycle Status=Production, Logic Function="Demultiplexer, Multiplexer", Low Level Output Current=25mA, Manufacturer Part Number=CD74HCT4053PWR, Mounting Technology="Surface Mount", Number of Bits=2, Number of Channels=2, Number of Circuits=1, Number of Inputs=6, Number of Outputs=3, Operating Supply Voltage=5V, Packaging="Cut Tape", Pins=16, Polarity=Non-Inverting, Pricing="1=0.39, 10=0.271, 25=0.39, 100=0.2099, 250=0.19452, 500=0.18526, 1000=0.17839 (EUR)", Propagation Delay=12ns, Radiation Hardening=No, RoHS=Compliant, Schedule B="8542390000, 8542390000|8542390000|8542390000|8542390000|8542390000", Stock=5404, Supplier=DigiKey, Supply Type="Dual, Single", Thickness=1mm, Throw Configuration=SPDT, Turn-Off Delay Time=44ns, Turn-On Delay Time=48ns, Weight=61.887009mg, Width=4.4mm
U6: "IC ADC 16BIT SIGMA-DELTA 10VSSOP", Ambient Temperature Range High=125°C, Case/Package=VSSOP, LCSC Part Number=C37593, Manufacturer="Texas Instruments", Manufacturer Lifecycle Status=ACTIVE, Max Junction Temperature (Tj)=150°C, Max Supply Voltage=5.5V, Min Operating Temperature=-40°C, Min Supply Voltage=2V, Nominal Supply Current=150µA, Power Dissipation=900µW, Supplier Part Number=296-38849-1-ND, Category="Analog to Digital Converters (ADCs)", ComponentLink1Description=https://datasheet.octopart.com:443/ADS1115IDGSR-Texas-Instruments-datasheet-21818186.pdf?src-supplier=Newark, ComponentLink1URL=https://datasheet.octopart.com:443/ADS1115IDGSR-Texas-Instruments-datasheet-21818186.pdf?src-supplier=Newark, ComponentLink2Description=https://octopart.com:443/opatz8j6/c1?t=IuqcA-XNANVnUgh6bO5qed4pAqyN2BqXsIjLAySB2Hr-eHtD8pK9l6OOA6AGsTuVanxQmOkBsFQN-rlHciEN_k6CTJvcjzCJlSq-wVqGrNuiBwTkWy4ml0ROCJtQ1-lij77U2D_WoJ3znwfT0mMt9ikQ9I9gRMar-xW9CqMxsY2FjbMMvAysjMOkXQ1FlQyveQwqsSa6_aCP81y3rIEwyR4aAdYLYQAG9CvpdWj9_mOw_IWbI1A0mS4Nr3T47cwXgL4gd3vwJQBENC_vJJ1ljWY6eimCFVEfMSp8To8QyZoXqbl__zcnRO1ari-Z50yUygNu99GuoBJUHWWpTBL6cSd8XR7eVfe8TQCRE2bK5TYPZsJNK_jD7hLJEK0orzhEdbBg33g&src-supplier=Texas+Instruments, ComponentLink2URL=https://octopart.com:443/opatz8j6/c1?t=IuqcA-XNANVnUgh6bO5qed4pAqyN2BqXsIjLAySB2Hr-eHtD8pK9l6OOA6AGsTuVanxQmOkBsFQN-rlHciEN_k6CTJvcjzCJlSq-wVqGrNuiBwTkWy4ml0ROCJtQ1-lij77U2D_WoJ3znwfT0mMt9ikQ9I9gRMar-xW9CqMxsY2FjbMMvAysjMOkXQ1FlQyveQwqsSa6_aCP81y3rIEwyR4aAdYLYQAG9CvpdWj9_mOw_IWbI1A0mS4Nr3T47cwXgL4gd3vwJQBENC_vJJ1ljWY6eimCFVEfMSp8To8QyZoXqbl__zcnRO1ari-Z50yUygNu99GuoBJUHWWpTBL6cSd8XR7eVfe8TQCRE2bK5TYPZsJNK_jD7hLJEK0orzhEdbBg33g&src-supplier=Texas+Instruments, ComponentLink3Description=https://datasheet.octopart.com:443/ADS1115IDGSR-Texas-Instruments-datasheet-10254488.pdf?src-supplier=Texas+Instruments, ComponentLink3URL=https://datasheet.octopart.com:443/ADS1115IDGSR-Texas-Instruments-datasheet-10254488.pdf?src-supplier=Texas+Instruments, ComponentLink4Description=https://datasheet.octopart.com:443/ADS1115IDGSR-Texas-Instruments-datasheet-10258908.pdf?src-supplier=Texas+Instruments, ComponentLink4URL=https://datasheet.octopart.com:443/ADS1115IDGSR-Texas-Instruments-datasheet-10258908.pdf?src-supplier=Texas+Instruments, ComponentLink5Description=https://sigma.octopart.com:443/49250172/technical_drawing/Texas-Instruments-ADS1115IDGSR.pdf?src-supplier=Texas+Instruments, ComponentLink5URL=https://sigma.octopart.com:443/49250172/technical_drawing/Texas-Instruments-ADS1115IDGSR.pdf?src-supplier=Texas+Instruments, ComponentLink6Description=https://datasheet.octopart.com:443/ADS1115IDGSR-Texas-Instruments-datasheet-159114584.pdf?src-supplier=LCSC, ComponentLink6URL=https://datasheet.octopart.com:443/ADS1115IDGSR-Texas-Instruments-datasheet-159114584.pdf?src-supplier=LCSC, ComponentLink7Description=https://datasheet.octopart.com:443/ADS1115IDGSR-Texas-Instruments-datasheet-164412415.pdf?src-supplier=SHENGYU+ELECTRONICS, ComponentLink7URL=https://datasheet.octopart.com:443/ADS1115IDGSR-Texas-Instruments-datasheet-164412415.pdf?src-supplier=SHENGYU+ELECTRONICS, ComponentLink8Description=https://datasheet.octopart.com:443/ADS1115IDGSR-Texas-Instruments-datasheet-78774318.pdf?src-supplier=Farnell, ComponentLink8URL=https://datasheet.octopart.com:443/ADS1115IDGSR-Texas-Instruments-datasheet-78774318.pdf?src-supplier=Farnell, ComponentLink9Description=https://datasheet.octopart.com:443/ADS1115IDGSR-Texas-Instruments-datasheet-150582607.pdf?src-supplier=Arrow.cn, ComponentLink9URL=https://datasheet.octopart.com:443/ADS1115IDGSR-Texas-Instruments-datasheet-150582607.pdf?src-supplier=Arrow.cn, ComponentLink10Description=https://datasheet.octopart.com:443/ADS1115IDGSR-Texas-Instruments-datasheet-14070808.pdf?src-supplier=iiiC, ComponentLink10URL=https://datasheet.octopart.com:443/ADS1115IDGSR-Texas-Instruments-datasheet-14070808.pdf?src-supplier=iiiC, ComponentLink11Description=http://sigma.octopart.com:80/conflict_mineral_statement/Texas-Instruments-company-63.pdf?src-supplier=Compliance+Statements, ComponentLink11URL=http://sigma.octopart.com:80/conflict_mineral_statement/Texas-Instruments-company-63.pdf?src-supplier=Compliance+Statements, ComponentLink12Description=http://sigma.octopart.com:80/reach_statement/Texas-Instruments-company-64.pdf?src-supplier=Compliance+Statements, ComponentLink12URL=http://sigma.octopart.com:80/reach_statement/Texas-Instruments-company-64.pdf?src-supplier=Compliance+Statements, Contact Plating=Gold, Conversion Rate=860sps, Height=1.07mm, Integral Nonlinearity (INL)=1LSB, Interface=I2C, Lead Free="Lead Free", Length=3mm, Lifecycle Status=Production, Manufacturer Part Number=ADS1115IDGSR, Max Operating Temperature=125°C, Max Supply Voltage (DC)=5.5V, Min Supply Voltage (DC)=2V, Number of A/D Converters=1, Number of Bits=16, Number of Channels=2, Number of Converters=1, Number of Inputs=4, Pins=10, Polarity=Bipolar, Pricing="1=4.36, 10=3.329, 25=4.36, 100=2.785, 250=2.64912, 500=2.56724, 1000=2.49986 (EUR)", Radiation Hardening=No, REACH SVHC=No, Resolution=2B, RoHS=Compliant, Sampling Rate=860sps, Schedule B="8542390000, 8542390000|8542390000|8542390000|8542390000|8542390000", Stock=9217, Supplier=DigiKey, Supply Type=Single, Thickness=1.02mm, Width=3mm